# Altium PCB Inverter_full.PcbDoc (part 1 of 2)
Units mm, origin at the board's own origin, x right, y up, seen from the top; angles counter-clockwise.
Board outline 209.55 x 115.54 mm, 2 copper layers (Top Layer, Bottom Layer); 189 components, 97 nets, 520 pads, 122 vias.
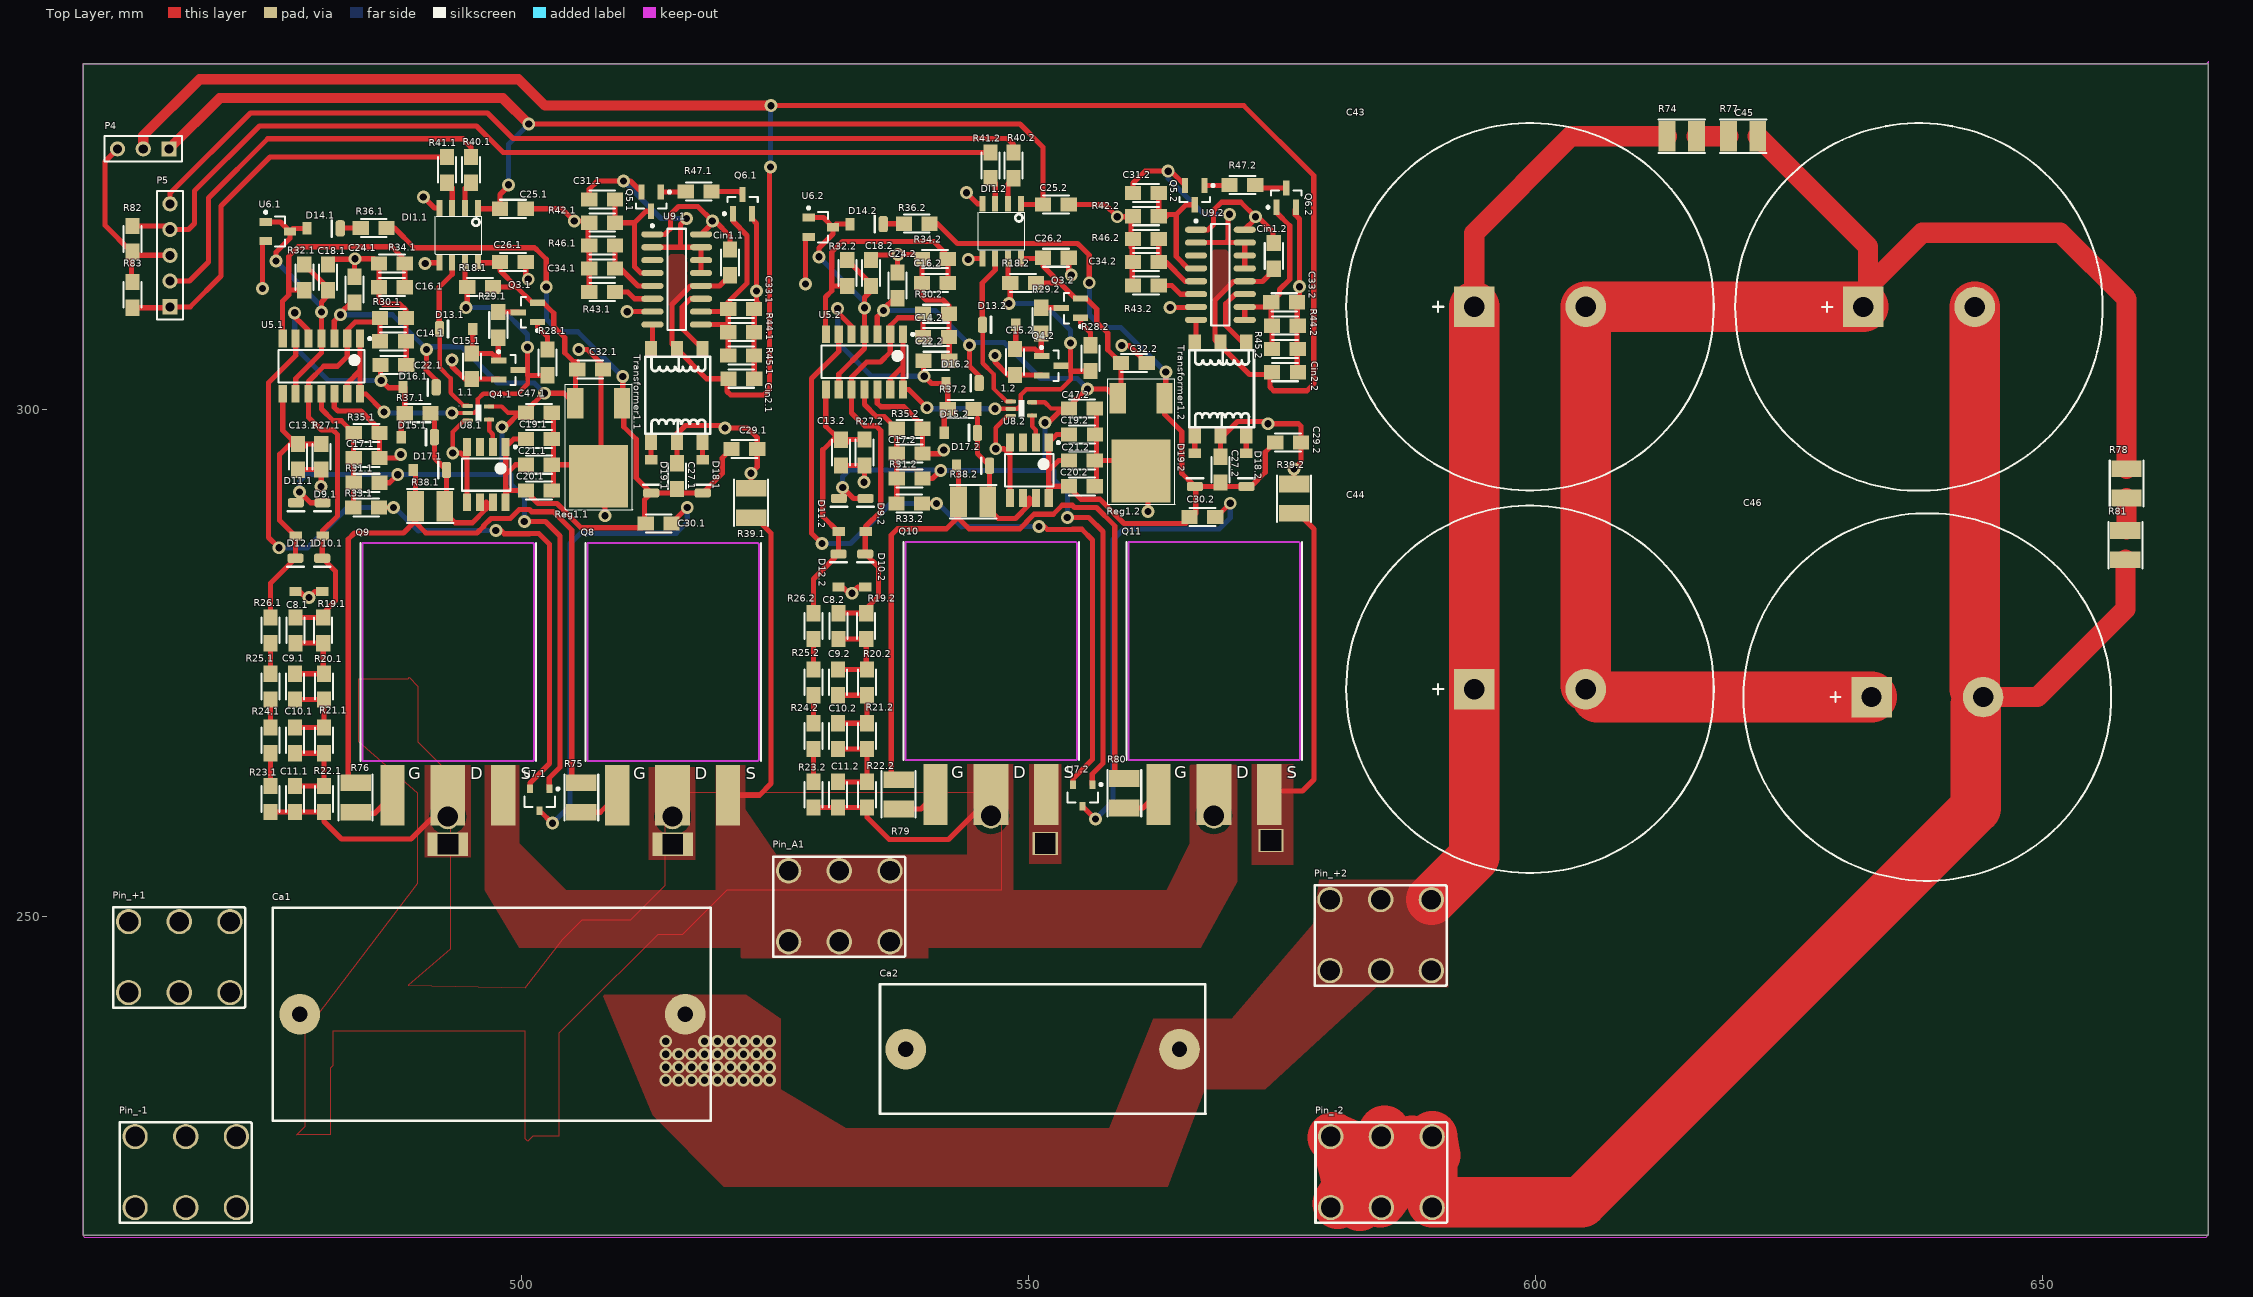
[diagram p0: Top Layer view]
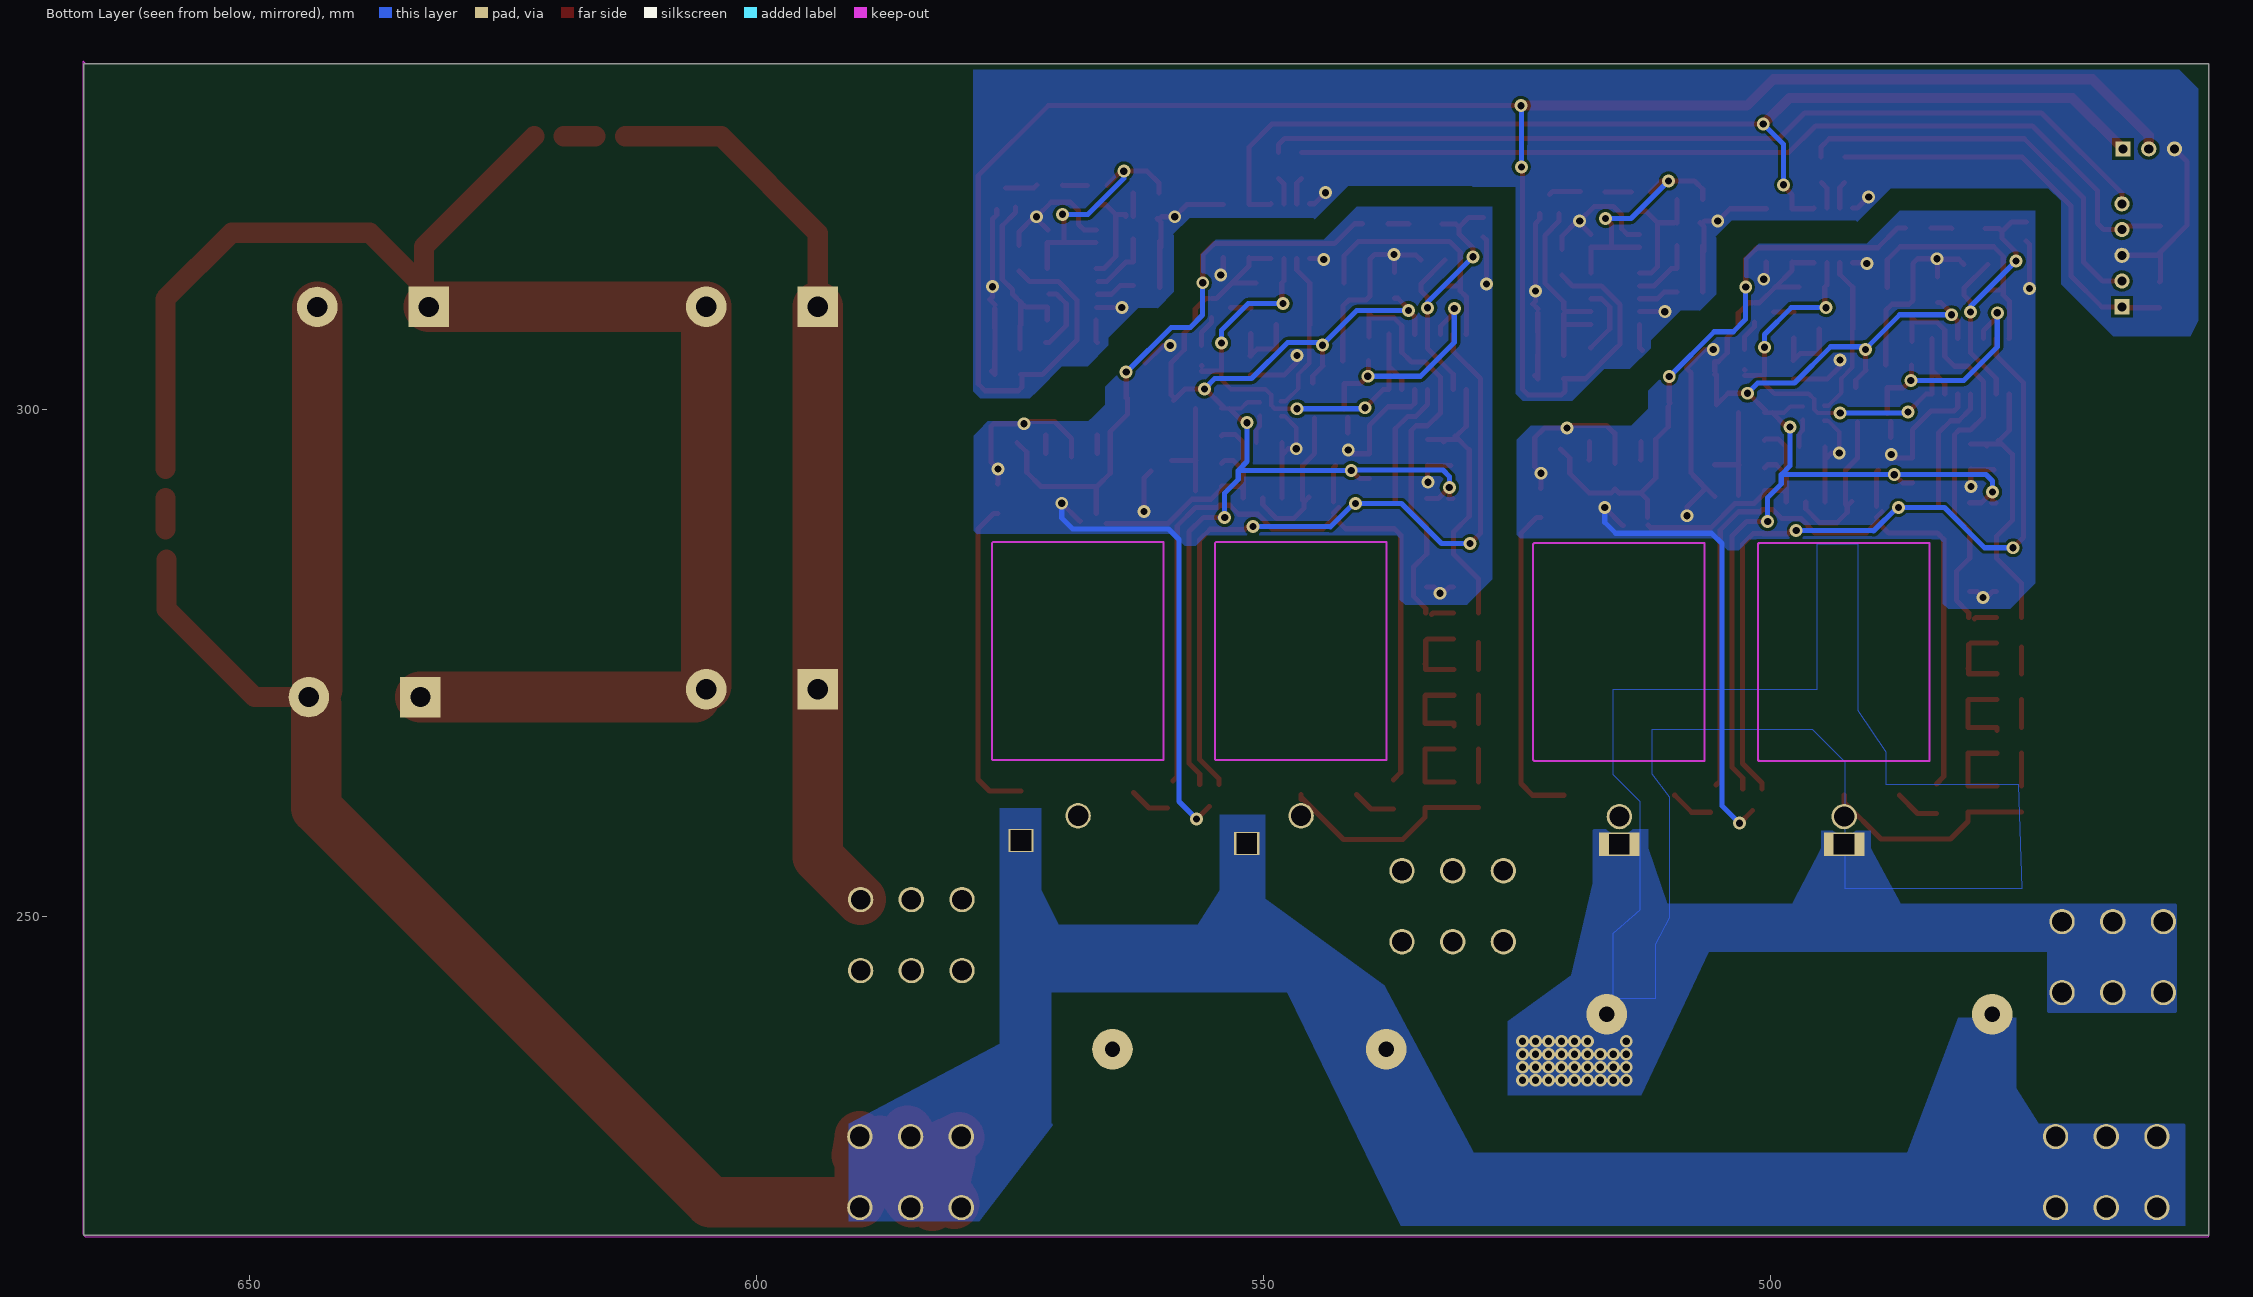
[diagram p1: Bottom Layer view, seen from below]

## Layer stack, top to bottom
Top Solder: solder mask 0.0102, Solder Resist, Dk 3.5
Top Layer: signal copper 0.0356
Dielectric 1: dielectric 0.32, FR-4, Dk 4.8
Bottom Layer: signal copper 0.0356
Bottom Solder: solder mask 0.0102, Solder Resist, Dk 3.5

## Board outline
456.82,218.59 666.37,218.59 666.37,334.13 456.82,334.13

## Design rules (kind name [scope] priority, off if disabled: settings)
Clearance Clearance_1 [InNet('COMMAND.1') vs InNet('OK!.1')] p1: gap=0.2
Clearance [All] p2: gap=0.3
PlaneConnect [All] p1: planeconnectstyle=Direct reliefexpansion=0.508 reliefentries=4 reliefconductorwidth=0.254 reliefairgap=0.254
PolygonConnect [All] p1: connectstyle=Direct reliefconductorwidth=0.254 reliefentries=4 polygonreliefangle="90 Angle" airgapwidth=0.254
RoomDefinition GD1 [InComponentClass('GD1')] p1: confinementstyle=ConfineIn formatcopy=TRUE lockcomponents=FALSE outline 473.97,256.53 525.39,256.53 525.39,326.57 473.97,326.57
RoomDefinition Supply_Iso1 [InComponentClass('Supply_Iso1')] p2: confinementstyle=ConfineIn formatcopy=TRUE lockcomponents=FALSE outline 504.3,285.78 525.43,285.78 525.43,323.58 504.3,323.58
RoomDefinition Supply_Iso2 [InComponentClass('Supply_Iso2')] p3: confinementstyle=ConfineIn formatcopy=TRUE lockcomponents=FALSE outline 557.66,288.18 579.21,288.18 579.21,323.63 557.66,323.63
RoomDefinition OnePhaseMain [InComponentClass('OnePhaseMain')] p4: confinementstyle=ConfineIn formatcopy=TRUE lockcomponents=FALSE outline 458.29,307.98 467.82,307.98 467.82,328.79 458.29,328.79
RoomDefinition MainPower [InComponentClass('MainPower')] p5: confinementstyle=ConfineIn formatcopy=TRUE lockcomponents=FALSE outline 457.88,217.81 660.94,217.81 660.94,329.37 457.88,329.37
RoomDefinition GD2 [InComponentClass('GD2')] p6: confinementstyle=ConfineIn formatcopy=TRUE lockcomponents=FALSE outline 527.21,258.66 583.21,258.66 583.21,326.5 527.21,326.5
RoutingVias [All] p1: holewidth=0.711 width=1.27 viastyle="Through Hole" minholewidth=0.711 minwidth=1.27 maxholewidth=0.711 maxwidth=1.27
SolderMaskExpansion [All] p1: expansion=0.102
UnpouredPolygon [All] p1: allowunpoured=FALSE
Width Width_1 [All] p1: maxlimit=1 minlimit=0.3 preferedwidth=0.51 toplayer_prefwidth=0.5 minimp=50.000000 maximp=50.000000 favimp=50.000000
28 further rules are at their usual default settings.

## Classes and differential pairs
channel class GateDriverPowerSupply: Supply_Iso1 Supply_Iso2
channel class DriverAndProtection: GD1 GD2
net class S[1..2]: S2
net class OK[1..2]: OK1 OK2
net class G[1..2]: G1 G2
net class D[1..2]: D1 D2
net class CMD[1..2]: CMD1 CMD2
component class Supply_Iso2: C27.2 C29.2 C30.2 C31.2 C32.2 C33.2 C34.2 Cin1.2 Cin2.2 D18.2 D19.2 Q5.2 Q6.2 R42.2 R43.2 R44.2 R45.2 R46.2 R47.2 Reg1.2 Transformer1.2 U9.2
component class Supply_Iso1: C27.1 C29.1 C30.1 C31.1 C32.1 C33.1 C34.1 Cin1.1 Cin2.1 D18.1 D19.1 Q5.1 Q6.1 R42.1 R43.1 R44.1 R45.1 R46.1 R47.1 Reg1.1 Transformer1.1 U9.1
component class OnePhaseMain: P4 P5 R82 R83 R?
component class MainPower: C43 C44 C45 C46 Ca1 Ca2 Pin_+1 Pin_+2 Pin_-1 Pin_-2 Pin_A1 Q8 Q9 Q10 Q11 R74 R75 R76 R77 R78 R79 R80 R81
component class GD2: 1.2 C8.2 C9.2 C10.2 C11.2 C13.2 C14.2 C15.2 C16.2 C17.2 C18.2 C19.2 C20.2 C21.2 C22.2 C24.2 C25.2 C26.2 C47.2 C?.2 D9.2 D10.2 D11.2 D12.2 D13.2 D14.2 D15.2 D16.2 D17.2 D?.2 DI1.2 Q3.2 Q4.2 R18.2 R19.2 R20.2 R21.2 R22.2 R23.2 R24.2 R25.2 R26.2 R27.2 R28.2 R29.2 R30.2 R31.2 R32.2 R33.2 R34.2 R35.2 R36.2 R37.2 R38.2 R39.2 R40.2 R41.2 R?.2 U5.2 U6.2 U7.2 U8.2
component class GD1: 1.1 C8.1 C9.1 C10.1 C11.1 C12.1 C13.1 C14.1 C15.1 C16.1 C17.1 C18.1 C19.1 C20.1 C21.1 C22.1 C24.1 C25.1 C26.1 C47.1 C?.1 D9.1 D10.1 D11.1 D12.1 D13.1 D14.1 D15.1 D16.1 D17.1 D?.1 DI1.1 Q3.1 Q4.1 R18.1 R19.1 R20.1 R21.1 R22.1 R23.1 R24.1 R25.1 R26.1 R27.1 R28.1 R29.1 R30.1 R31.1 R32.1 R33.1 R34.1 R35.1 R36.1 R37.1 R38.1 R39.1 R40.1 R41.1 R?.1 U5.1 U6.1 U7.1

## Components (designator, comment, footprint, x,y, rotation, side; value= is the part's Value field where it differs from the comment)
1.1 "" SOT353 495.769,299.681 r0 top (schematic designator 1)
1.2 "" SOT353 549.319,300.101 r0 top (schematic designator 1)
C8.1 "Cap_0805" 0805_W 477.71,278.257 r90 top (schematic designator C8)
C8.2 "Cap_0805" 0805_W 531.26,278.677 r90 top (schematic designator C8)
C9.1 "Cap_0805" 0805_W 477.681,272.706 r90 top (schematic designator C9)
C9.2 "Cap_0805" 0805_W 531.231,273.127 r90 top (schematic designator C9)
C10.1 "Cap_0805" 0805_W 477.681,267.406 r90 top (schematic designator C10)
C10.2 "Cap_0805" 0805_W 531.231,267.827 r90 top (schematic designator C10)
C11.1 "Cap_0805" 0805_W 477.681,261.62 r90 top (schematic designator C11)
C11.2 "Cap_0805" 0805_W 531.231,262.04 r90 top (schematic designator C11)
C13.1 "Cap_0805" 0805_W 477.99,295.38 r270 top (schematic designator C13)
C13.2 "Cap_0805" 0805_W 531.54,295.8 r270 top (schematic designator C13)
C14.1 "Cap_0805" 0805_W 487.34,306.769 r0 top (schematic designator C14)
C14.2 "Cap_0805" 0805_W 540.89,307.189 r0 top (schematic designator C14)
C15.1 "Cap_0805" 0805_W 495.13,304.308 r270 top (schematic designator C15)
C15.2 "Cap_0805" 0805_W 548.68,304.729 r270 top (schematic designator C15)
C16.1 "Cap_0805" 0805_W 487.25,312.09 r180 top (schematic designator C16)
C16.2 "Cap_0805" 0805_W 540.8,312.51 r180 top (schematic designator C16)
C17.1 "Cap_0805" 0805_W 484.73,295.27 r0 top (schematic designator C17)
C17.2 "Cap_0805" 0805_W 538.28,295.69 r0 top (schematic designator C17)
C18.1 "Cap_0805" 0805_W 480.93,313.07 r90 top (schematic designator C18)
C18.2 "Cap_0805" 0805_W 534.48,313.49 r90 top (schematic designator C18)
C19.1 "Cap_0805" 0805_W 501.75,297.13 r180 top (schematic designator C19)
C19.2 "Cap_0805" 0805_W 555.3,297.55 r180 top (schematic designator C19)
C20.1 "Capacitor_nao_polarizado" 0805_W 501.73,292.05 r0 top (schematic designator C20)
C20.2 "Capacitor_nao_polarizado" 0805_W 555.28,292.47 r0 top (schematic designator C20)
C21.1 "Capacitor_nao_polarizado" 0805_W 501.73,294.6 r0 top (schematic designator C21)
C21.2 "Capacitor_nao_polarizado" 0805_W 555.28,295.02 r0 top (schematic designator C21)
C22.1 "Cap_0805" 0805_W 487.37,304.43 r0 top (schematic designator C22)
C22.2 "Cap_0805" 0805_W 540.92,304.85 r0 top (schematic designator C22)
C24.1 "Cap_0805" 0805_W 483.54,311.85 r90 top (schematic designator C24)
C24.2 "Cap_0805" 0805_W 537.09,312.27 r90 top (schematic designator C24)
C25.1 "Cap_0805" 0805_W 499.18,319.82 r180 top (schematic designator C25)
C25.2 "Cap_0805" 0805_W 552.73,320.24 r180 top (schematic designator C25)
C26.1 "Cap_0805" 0805_W 499.18,314.573 r180 top (schematic designator C26)
C26.2 "Cap_0805" 0805_W 552.73,314.993 r180 top (schematic designator C26)
C27.1 "Capacitor_nao_polarizado" 0805_W 515.331,293.449 r90 top (schematic designator C27)
C27.2 "Capacitor_nao_polarizado" 0805_W 568.947,294.089 r90 top (schematic designator C27)
C29.1 "Capacitor_nao_polarizado" 0805_W 521.99,296.16 r0 top (schematic designator C29)
C29.2 "Capacitor_nao_polarizado" 0805_W 575.605,296.8 r0 top (schematic designator C29)
C30.1 "Capacitor_nao_polarizado" 0805_W 513.54,288.8 r0 top (schematic designator C30)
C30.2 "Capacitor_nao_polarizado" 0805_W 567.155,289.44 r0 top (schematic designator C30)
C31.1 "Cap_0805" 0805_W 507.968,320.743 r0 top (schematic designator C31)
C31.2 "Cap_0805" 0805_W 561.583,321.383 r0 top (schematic designator C31)
C32.1 "Capacitor_nao_polarizado" 0805_W 506.79,303.98 r0 top (schematic designator C32)
C32.2 "Capacitor_nao_polarizado" 0805_W 560.405,304.62 r0 top (schematic designator C32)
C33.1 "Cap_0805" 0805_W 521.691,309.939 r180 top (schematic designator C33)
C33.2 "Cap_0805" 0805_W 575.24,310.6 r180 top (schematic designator C33)
C34.1 "Cap_0805" 0805_W 507.981,313.919 r180 top (schematic designator C34)
C34.2 "Cap_0805" 0805_W 561.597,314.559 r180 top (schematic designator C34)
C43 "Cap2" "Capacitor Eletrolitico - duplicate" 593.97,310.17 r0 top
C44 "Cap2" "Capacitor Eletrolitico - duplicate" 593.97,272.45 r0 top
C45 "Cap2" "Capacitor Eletrolitico - duplicate" 632.33,310.15 r0 top
C46 "Cap2" "Capacitor Eletrolitico - duplicate" 633.16,271.68 r0 top
C47.1 "Capacitor_nao_polarizado" 0805_W 501.748,299.7 r180 top (schematic designator C47)
C47.2 "Capacitor_nao_polarizado" 0805_W 555.298,300.12 r180 top (schematic designator C47)
Ca1 "Polyester" "Capacitor_Pol_2 - 38mm" 516.16,240.39 r180 top
Ca2 "Polyester" Capacitor_Pol_2 564.91,236.95 r180 top
Cin1.1 "Cap_0805" 0805_W 520.581,314.54 r90 top (schematic designator Cin1)
Cin1.2 "Cap_0805" 0805_W 574.196,315.18 r90 top (schematic designator Cin1)
Cin2.1 "Cap_0805" 0805_W 521.691,303.081 r0 top (schematic designator Cin2)
Cin2.2 "Cap_0805" 0805_W 575.306,303.721 r0 top (schematic designator Cin2)
D9.1 "D Schottky" SOD-123 480.404,289.208 r90 top (schematic designator D9)
D9.2 "D Schottky" SOD-123 533.954,289.628 r90 top (schematic designator D9)
D10.1 "D Schottky" SOD-123 480.364,283.735 r90 top (schematic designator D10)
D10.2 "D Schottky" SOD-123 533.914,284.155 r90 top (schematic designator D10)
D11.1 "D Schottky" SOD-123 477.77,289.208 r90 top (schematic designator D11)
D11.2 "D Schottky" SOD-123 531.32,289.628 r90 top (schematic designator D11)
D12.1 "D Schottky" SOD-123 477.73,283.735 r90 top (schematic designator D12)
D12.2 "D Schottky" SOD-123 531.28,284.155 r90 top (schematic designator D12)
D13.1 "B2-smd" SOD-123 493.57,307.97 r180 top (schematic designator D13)
D13.2 "B2-smd" SOD-123 547.12,308.39 r180 top (schematic designator D13)
D14.1 "Bzv55c6v8" SOD-123 480.51,317.9 r0 top (schematic designator D14)
D14.2 "Bzv55c6v8" SOD-123 534.06,318.32 r0 top (schematic designator D14)
D15.1 "D Schottky" SOD-123 489.799,297.308 r0 top (schematic designator D15)
D15.2 "D Schottky" SOD-123 543.349,297.728 r0 top (schematic designator D15)
D16.1 "D Schottky" SOD-123 489.97,302.22 r0 top (schematic designator D16)
D16.2 "D Schottky" SOD-123 543.52,302.64 r0 top (schematic designator D16)
D17.1 "B2-smd" SOD-123 490.99,294.07 r0 top (schematic designator D17)
D17.2 "B2-smd" SOD-123 544.54,294.49 r0 top (schematic designator D17)
D18.1 "B2-SMD" SOD-123 517.891,293.436 r270 top (schematic designator D18)
D18.2 "B2-SMD" SOD-123 571.506,294.076 r270 top (schematic designator D18)
D19.1 "B2-smd" SOD-123 512.811,293.436 r270 top (schematic designator D19)
D19.2 "B2-smd" SOD-123 566.426,294.076 r270 top (schematic designator D19)
DI1.1 "Si8421AD-D-IS" 8SOIC 495.724,314.506 r0 top (schematic designator DI1)
DI1.2 "Si8421AD-D-IS" 8SOIC 549.274,314.926 r0 top (schematic designator DI1)
P4 "Header 3" HDR1X3 465.26,325.74 r180 top
P5 "Header 5" HDR1X5 465.36,310.16 r90 top
Pin_+1 "Socket" "Power conector" 471.27,249.54 r180 top
Pin_+2 "Socket" "Power conector" 589.75,251.71 r180 top
Pin_-1 "Socket" "Power conector" 471.91,228.34 r180 top
Pin_-2 "Socket" "Power conector" 589.82,228.34 r180 top
Pin_A1 "Socket" "Power conector" 536.36,254.55 r180 top
Q3.1 "BC857" SOT-23-TT3_N 500.65,309.61 r180 top (schematic designator Q3)
Q3.2 "BC857" SOT-23-TT3_N 554.2,310.03 r180 top (schematic designator Q3)
Q4.1 "BC847" SOT-23-TT3_N 498.72,303.93 r0 top (schematic designator Q4)
Q4.2 "BC847" SOT-23-TT3_N 552.27,304.35 r0 top (schematic designator Q4)
Q5.1 "BC857" SOT-23-TT3_N 512.801,320.541 r270 top (schematic designator Q5)
Q5.2 "BC857" SOT-23-TT3_N 566.416,321.181 r270 top (schematic designator Q5)
Q6.1 "BC847" SOT-23-TT3_N 521.818,320.292 r90 top (schematic designator Q6)
Q6.2 "BC847" SOT-23-TT3_N 575.433,320.932 r90 top (schematic designator Q6)
Q8 "IRFP260" TO227 514.92,261.99 r0 top
Q9 "IRFP260" TO227 492.752,261.99 r0 top
Q10 "IRFP260" TO227 546.31,262.07 r0 top
Q11 "IRFP260" TO227 568.3,262.07 r0 top
R18.1 "Res_0805" 0805_W 495.93,312.11 r0 top (schematic designator R18)
R18.2 "Res_0805" 0805_W 549.48,312.53 r0 top (schematic designator R18)
R19.1 "Res_0805" 0805_W 480.47,278.27 r270 top (schematic designator R19)
R19.2 "Res_0805" 0805_W 534.02,278.69 r270 top (schematic designator R19)
R20.1 "Res_0805" 0805_W 480.531,272.706 r90 top (schematic designator R20)
R20.2 "Res_0805" 0805_W 534.081,273.127 r90 top (schematic designator R20)
R21.1 "Res_0805" 0805_W 480.531,267.406 r90 top (schematic designator R21)
R21.2 "Res_0805" 0805_W 534.081,267.827 r90 top (schematic designator R21)
R22.1 "Res_0805" 0805_W 480.549,261.633 r270 top (schematic designator R22)
R22.2 "Res_0805" 0805_W 534.099,262.054 r270 top (schematic designator R22)
R23.1 "Res_0805" 0805_W 475.28,261.633 r270 top (schematic designator R23)
R23.2 "Res_0805" 0805_W 528.83,262.054 r270 top (schematic designator R23)
R24.1 "Res_0805" 0805_W 475.28,267.42 r270 top (schematic designator R24)
R24.2 "Res_0805" 0805_W 528.83,267.84 r270 top (schematic designator R24)
R25.1 "Res_0805" 0805_W 475.28,272.72 r270 top (schematic designator R25)
R25.2 "Res_0805" 0805_W 528.83,273.14 r270 top (schematic designator R25)
R26.1 "Res_0805" 0805_W 475.28,278.27 r270 top (schematic designator R26)
R26.2 "Res_0805" 0805_W 528.83,278.69 r270 top (schematic designator R26)
R27.1 "Res_0805" 0805_W 480.27,295.37 r90 top (schematic designator R27)
R27.2 "Res_0805" 0805_W 533.82,295.79 r90 top (schematic designator R27)
R28.1 "Res_0805" 0805_W 502.59,304.68 r270 top (schematic designator R28)
R28.2 "Res_0805" 0805_W 556.14,305.1 r270 top (schematic designator R28)
R29.1 "Res_0805" 0805_W 497.74,308.38 r270 top (schematic designator R29)
R29.2 "Res_0805" 0805_W 551.29,308.8 r270 top (schematic designator R29)
R30.1 "Res_0805" 0805_W 487.354,309.05 r180 top (schematic designator R30)
R30.2 "Res_0805" 0805_W 540.904,309.47 r180 top (schematic designator R30)
R31.1 "Res_0805" 0805_W 484.73,292.82 r0 top (schematic designator R31)
R31.2 "Res_0805" 0805_W 538.28,293.24 r0 top (schematic designator R31)
R32.1 "Res_0805" 0805_W 478.59,313.07 r90 top (schematic designator R32)
R32.2 "Res_0805" 0805_W 532.14,313.49 r90 top (schematic designator R32)
R33.1 "Res_0805" 0805_W 484.7,290.37 r0 top (schematic designator R33)
R33.2 "Res_0805" 0805_W 538.25,290.79 r0 top (schematic designator R33)
R34.1 "Res_0805" 0805_W 487.25,314.44 r180 top (schematic designator R34)
R34.2 "Res_0805" 0805_W 540.8,314.86 r180 top (schematic designator R34)
R35.1 "Res_0805" 0805_W 484.73,297.72 r0 top (schematic designator R35)
R35.2 "Res_0805" 0805_W 538.28,298.14 r0 top (schematic designator R35)
R36.1 "Res_0805" 0805_W 485.44,317.95 r0 top (schematic designator R36)
R36.2 "Res_0805" 0805_W 538.99,318.37 r0 top (schematic designator R36)
R37.1 "Res_0805" 0805_W 489.77,299.68 r0 top (schematic designator R37)
R37.2 "Res_0805" 0805_W 543.32,300.1 r0 top (schematic designator R37)
R38.1 "Res_1210" 1210_W 489.558,290.503 r0 top (schematic designator R38)
R38.2 "Res_1210" 1210_W 543.108,290.923 r0 top (schematic designator R38)
R39.1 "Res_1210" 1210_W 522.67,289.372 r90 top (schematic designator R39)
R39.2 "Res_1210" 1210_W 576.22,289.793 r90 top (schematic designator R39)
R40.1 "Res_1210" 0805_W 495.02,323.67 r90 top (schematic designator R40)
R40.2 "Res_1210" 0805_W 548.541,324.094 r90 top (schematic designator R40)
R41.1 "Res_1210" 0805_W 492.67,323.67 r90 top (schematic designator R41)
R41.2 "Res_1210" 0805_W 546.255,324.094 r90 top (schematic designator R41)
R42.1 "Res_0805" 0805_W 507.968,318.467 r0 top (schematic designator R42)
R42.2 "Res_0805" 0805_W 561.583,319.107 r0 top (schematic designator R42)
R43.1 "Res_0805" 0805_W 507.97,311.63 r0 top (schematic designator R43)
R43.2 "Res_0805" 0805_W 561.585,312.27 r0 top (schematic designator R43)
R44.1 "Res_0805" 0805_W 521.691,307.653 r180 top (schematic designator R44)
R44.2 "Res_0805" 0805_W 575.306,308.293 r180 top (schematic designator R44)
R45.1 "Res_0805" 0805_W 521.691,305.367 r180 top (schematic designator R45)
R45.2 "Res_0805" 0805_W 575.306,306.007 r180 top (schematic designator R45)
R46.1 "Res_0805" 0805_W 507.968,316.224 r0 top (schematic designator R46)
R46.2 "Res_0805" 0805_W 561.583,316.864 r0 top (schematic designator R46)
R47.1 "Res_0805" 0805_W 517.497,321.533 r180 top (schematic designator R47)
R47.2 "Res_0805" 0805_W 571.113,322.173 r180 top (schematic designator R47)
R74 "Res_1210" 1210_W 612.99,326.97 r0 top
R75 "Res_1210" 1210_W 505.93,260.32 r90 top
R76 "Res_1210" 1210_W 483.66,260.32 r90 top
R77 "Res_1210" 1210_W 619.04,326.97 r0 top
R78 "Res_1210" 1210_W 658.3,294.2 r270 top
R79 "Res_1210" 1210_W 537.21,260.63 r90 top
R80 "Res_1210" 1210_W 559.48,260.74 r90 top
R81 "Res_1210" 1210_W 658.19,288.11 r270 top
R82 "Res_1210" 0805_W 461.659,316.86 r270 top
R83 "Res_1210" 0805_W 461.64,311.34 r90 top
Reg1.1 "LM7805" LM7805 507.621,297.05 r90 top (schematic designator Reg1)
Reg1.2 "LM7805" LM7805 561.12,297.562 r90 top (schematic designator Reg1)
Transformer1.1 "WE-PP" Trafo 515.341,301.43 r270 top (schematic designator Transformer1)
Transformer1.2 "WE-PP" Trafo 568.956,302.07 r270 top (schematic designator Transformer1)
U5.1 "LM339" SOIC-14N 465.05,293.405 r270 top (schematic designator U5)
U5.2 "LM339" SOIC-14N 518.6,293.825 r270 top (schematic designator U5)
U6.1 "TL431ACLP" SOT-3N 475.99,317.59 r0 top (schematic designator U6)
U6.2 "TL431ACLP" SOT-3N 529.54,318.01 r0 top (schematic designator U6)
U7.1 "MCP9700T-E/TT" SOT-23_L 501.81,261.55 r270 top (schematic designator U7)
U7.2 "MCP9700T-E/TT" SOT-23_L 555.36,261.97 r270 top (schematic designator U7)
U8.1 "TC4420COA" SOIC-8N 496.555,293.625 r270 top (schematic designator U8)
U8.2 "TC4420COA" SOIC-8N 550.105,294.045 r270 top (schematic designator U8)
U9.1 "TL494ID" SOIC16_N 515.328,312.86 r0 top (schematic designator U9)
U9.2 "TL494ID" SOIC16_N 568.94,313.32 r0 top (schematic designator U9)

## Footprints (in the part's own frame and the unit in brackets; to place one, negate y for a bottom-side part, rotate by r counter-clockwise, add the part's x,y. Pads: shape width x height; smd on the part's side, far side on the other; paste and mask are expansions set on the pad)
8SOIC [mm] "SI841"
  rect 0.6x1.55 smd: 1(0,5.4) 2(-1.27,5.4) 3(-2.54,5.4) 4(-3.81,5.4) 5(-3.81,0) 6(-2.54,0) 7(-1.27,0) 8(0,0)
  silkscreen extent -4.19,0.86 0.39,4.58
0805_W [mm]
  rect 1.6x1.397 smd: 1(-1.263,-0.009) 2(1.277,-0.009)
  silkscreen extent -1.26,-0.9 1.28,0.88
1210_W [mm]
  rect 1.65x3 smd: 1(0,0) 2(2.9,0)
  silkscreen extent -0.83,-1.66 3.74,1.68
"Capacitor Eletrolitico - duplicate" [mm]
  rect 4x4 hole 2: 1(0,0)
  round 4 hole 2: 2(11,0)
  silkscreen extent -12.62,-18.12 23.62,18.12, body extent -12.63,-18.13 23.63,18.13, height 40
Capacitor_Pol_2 [mm]
  round 4 hole 1.5: 1(0,0) 2(27,0)
  silkscreen extent -2.57,-6.43 29.54,6.35
"Capacitor_Pol_2 - 38mm" [mm]
  round 4 hole 1.5: 1(0,0) 2(38,0)
  silkscreen extent -2.54,-10.52 40.66,10.5
HDR1X3 [mm] "Connector; Header; 3 Position"
  rect 1.5x1.5 hole 0.9: 1(0,0)
  round 1.5 hole 0.9: 2(2.54,0) 3(5.08,0)
  silkscreen extent -1.27,-1.27 6.35,1.27
HDR1X5 [mm] "Connector; Header; 5 Position"
  rect 1.5x1.5 hole 0.9: 1(0,0)
  round 1.5 hole 0.9: 2(2.54,0) 3(5.08,0) 4(7.62,0) 5(10.16,0)
  silkscreen extent -1.27,-1.27 11.43,1.27
LM7805 [mm]
  rect 6.2x5.8 smd: 1(-3.6,0)
  rect 3x1.6 smd: 2(3.6,2.3) 3(3.6,-2.3)
  silkscreen extent -6.88,-3.36 5.5,3.27
"Power conector" [mm] "Screw M4 and 30A"
  round 2.5 hole 1.93: 1(0,7) 1(0,0) 1(5,7) 1(5,0) 1(10,7) 1(10,0)
  silkscreen extent -1.5,-1.4 11.5,8.5
SOD-123 [mm] "Diodo"
  rect 0.91x1.22 smd: 1(-1.635,0)
  rrect50% 0.91x1.6 smd: 2(1.635,0)
  silkscreen extent 0.8,-0.8 0.8,0.8
SOIC16_N [mm] "SOIC, 16-Leads, Body 9.9x3.9mm, Pitch 1.27mm, IPC Medium Density"
  oval 2.2x0.6 smd: 1(-2.4,4.445) 2(-2.4,3.175) 3(-2.4,1.905) 4(-2.4,0.635) 5(-2.4,-0.635) 6(-2.4,-1.905) 7(-2.4,-3.175) 8(-2.4,-4.445) 9(2.4,-4.445) 10(2.4,-3.175) 11(2.4,-1.905) 12(2.4,-0.635) 13(2.4,0.635) 14(2.4,1.905) 15(2.4,3.175) 16(2.4,4.445)
  silkscreen extent -2.52,-5 0.9,5.42, body extent -2,-5 2,5, height 1.91
SOIC-8N [mm] "SOIC, 8-Leads, Body 4,89x3,90mm, Pitch 1,27mm, IPC Medium Density"
  rect 1.75x0.8 smd: 1(-2.725,1.905) 2(-2.725,0.635) 3(-2.725,-0.635) 4(-2.725,-1.905) 5(2.725,-1.905) 6(2.725,-0.635) 7(2.725,0.635) 8(2.725,1.905)
  silkscreen extent -2.85,-2.4 1.6,2.98, body extent -2,-2.4 2,2.4, height 3.18
SOIC-14N [mm] "SOIC, 14-Leads, Body 8,61x3,90mm, Pitch 1,27mm, IPC Medium Density"
  rect 1.75x0.8 smd: 1(-13.625,19.05) 2(-13.625,17.78) 3(-13.625,16.51) 4(-13.625,15.24) 5(-13.625,13.97) 6(-13.625,12.7) 7(-13.625,11.43) 8(-8.175,11.43) 9(-8.175,12.7) 10(-8.175,13.97) 11(-8.175,15.24) 12(-8.175,16.51) 13(-8.175,17.78) 14(-8.175,19.05)
  silkscreen extent -13.75,10.99 -9.3,20.13, body extent -12.9,10.99 -8.9,19.49, height 1.75
SOT353 [mm]
  round 0.5 on Mech15: 0(0,0)
  rrect50% 1x0.4 smd mask+0: 1(-1.05,0.71) 2(-1.05,0) 3(-1.05,-0.72) 4(1.05,-0.65) 5(1.05,0.65)
  silkscreen extent -0.3,-0.85 0.3,0.85, body extent -1.2,-1.1 1.2,1.1, height 1.1
SOT-3N [mm] "SOT23, 3-Leads, Body 2,90x2,45mm, Pitch 0,95mm, IPC Medium Density"
  rect 1.2x0.8 smd: 1(-1.2,0.95) 2(-1.2,-0.95) 3(1.2,0)
  silkscreen extent -1.32,-1.5 0.7,2.02, body extent -0.7,-1.5 0.7,1.5, height 1.1
SOT-23-TT3_N [mm] "SOT23, 3-Leads, Body 2.9x1.3mm, Pitch 0.95mm, Lead Span 2.4mm, IPC Medium Density"
  rect 1.5x0.6 smd: 1(-0.95,0.95) 2(-0.95,-0.95) 3(0.95,0)
  silkscreen extent -1.07,-1.5 0.7,1.92, body extent -0.7,-1.5 0.7,1.5, height 1.12
SOT-23_L [mm] "SOT23, 3-Leads, Body 2.9x1.3mm, Pitch 0.95mm, Lead Span 2.5mm, IPC High Density"
  rect 0.85x0.6 smd: 1(-1.075,0.95) 2(-1.075,-0.95) 3(1.075,0)
  silkscreen extent -1.2,-1.5 0.7,1.93, body extent -0.7,-1.5 0.7,1.5, height 1.1
TO227 [mm]
  rect 2.39x6 smd: 1(-5.46,0) 3(5.46,0)
  round 2.5 hole 2: 2(0,-2.1)
  rect 3.43x6 smd: 2(0,0)
  Keep-Out Layer lines w0.2: -8.4,3.38 8.4,3.38 8.5,3.48 8.5,24.78 8.4,24.88 -8.4,24.88 -8.4,3.38
  silkscreen extent -8.6,3.38 8.7,24.88, body extent -8.5,3.38 8.5,24.88, height 2.5
Trafo [mm] "transformador smd TI"
  rect 1.6x1.2 smd: 1(-4.57,2.54) 2(-4.57,0) 3(-4.57,-2.54) 4(4.57,-2.54) 5(4.57,0) 6(4.57,2.54)
  silkscreen extent -3.8,-3.1 3.8,3.3

## Part data
1.1 1.2: library part AND
C8.1 C8.2 C9.1 C9.2 C10.1 C10.2 C11.1 C11.2 C13.1 C13.2 C14.1 C14.2 C15.1 C15.2 C16.1 C16.2 C17.1 C17.2 C18.1 C18.2 C19.1 C19.2 C22.1 C22.2 C24.1 C24.2 C25.1 C25.2 C26.1 C26.2 C31.1 C31.2 C33.1 C33.2 C34.1 C34.2 C43 C44 C45 C46 Cin1.1 Cin1.2 Cin2.1 Cin2.2: "Capacitor"
C20.1 C20.2 C21.1 C21.2 C27.1 C27.2 C29.1 C29.2 C30.1 C30.2 C32.1 C32.2 C47.1 C47.2: "Capacitor nao polarizado"
Ca1 Ca2: library part GRM21BC81E475KA12L, "GRM21BC81E475KA1"
D9.1 D9.2 D10.1 D10.2 D11.1 D11.2 D12.1 D12.2 D15.1 D15.2 D16.1 D16.2: "Schottky Diode"
D13.1 D13.2 D17.1 D17.2 D18.1 D18.2 D19.1 D19.2: library part Schottky, "Diodo Schottky"
D14.1 D14.2: library part "D Zener", "Zener Diode"
DI1.1 DI1.2: library part FOD8012, "Two Channel, High Speed Digital Isolators"
P4: "Header, 3-Pin"
P5: "Header, 5-Pin"
Q3.1 Q3.2 Q5.1 Q5.2: "PNP General-purpose Transistor"
Q4.1 Q4.2 Q6.1 Q6.2: "NPN General-purpose Transistor"
Q8 Q9 Q10 Q11: "HEXFET Power MOSFET"
R18.1 R18.2 R19.1 R19.2 R20.1 R20.2 R21.1 R21.2 R22.1 R22.2 R23.1 R23.2 R24.1 R24.2 R25.1 R25.2 R26.1 R26.2 R27.1 R27.2 R28.1 R28.2 R29.1 R29.2 R30.1 R30.2 R31.1 R31.2 R32.1 R32.2 R33.1 R33.2 R34.1 R34.2 R35.1 R35.2 R36.1 R36.2 R37.1 R37.2 R42.1 R42.2 R43.1 R43.2 R44.1 R44.2 R45.1 R45.2 R46.1 R46.2 R47.1 R47.2: "Resistor"
R38.1 R38.2 R39.1 R39.2 R40.1 R40.2 R41.1 R41.2 R74 R75 R76 R77 R78 R79 R80 R81 R82 R83: library part Res_0805, "Resistor"
Transformer1.1 Transformer1.2: library part Trafo-TI
U5.1 U5.2: library part LM339AD, "Low-Power Quad Voltage Comparator"
U6.1 U6.2: "Programmable Precision Reference"
U7.1 U7.2: "Low-Power Linear Active Thermistor IC, 3-Pin SOT-23, Extended Temperature, Tape and Reel"
U8.1 U8.2: "6A High-Speed MOSFET Driver, Non-Inverting, Commercial Temperature"
U9.1 U9.2: "Pulse-Width-Modulation Control Circuit"

## Free pads (board coordinates)
  rect 4x2.3 hole 2 square unplated: 2(492.758,257.171) 2(514.927,257.171)
  rect 2.5x2.3 hole 2 square unplated: 2(551.67,257.24) 2(573.93,257.54)

## Via types
v1: diameter 1.27, hole 0.711, Top Layer to Bottom Layer, 122 vias

## Nets (pads, with @x,y where several pads share a name; then routed paths per layer and width w, separated by ;. In a path a pad name is that pad's centre, name@x,y a point inside that pad or via, vN(x,y) a via of type N, cw(c..) or ccw(c..) an arc to the next point about the centre after c; other vN are vias at no path point)
5V_REF.1: C31.1.1 Q5.1.2 U9.1.2 U9.1.13 U9.1.14 U9.1.15 | length 25.1
  Top Layer w0.51: C31.1.1@506.705,320.734 506.705,321.765 507.52,322.58 v1(510.071,322.58) 510.762,322.58 Q5.1.2@511.851,321.491 ; U9.1.2@512.928,316.035 515.697,316.035 ; v1(516.287,318.864) 515.697,318.274 515.697,316.035 ; U9.1.13@517.728,313.495 U9.1.14@517.728,314.765 U9.1.15@517.728,316.035 515.697,316.035
  Bottom Layer w0.51: v1(510.071,322.58) 513.787,318.864 v1(516.287,318.864)
5V_REF.2: C31.2.1 Q5.2.2 U9.2.2 U9.2.13 U9.2.14 U9.2.15 | length 25.7
  Top Layer w0.51: C31.2.1@560.32,321.374 560.32,322.36 561.5,323.54 v1(563.79,323.54) 564.057,323.54 Q5.2.2@565.466,322.131 ; U9.2.2@566.54,316.495 569.48,316.495 ; v1(569.837,319.284) 569.685,319.132 569.685,316.7 569.48,316.495 ; U9.2.13@571.34,313.955 U9.2.14@571.34,315.225 U9.2.15@571.34,316.495 569.48,316.495
  Bottom Layer w0.51: v1(563.79,323.54) 563.79,322.831 567.351,319.27 569.823,319.27 v1(569.837,319.284)
+5: C25.1.2 C25.2.2 DI1.1.1 DI1.2.1 P4.1 | length 109.9
  Top Layer w0.51: DI1.1.1@495.724,319.906 495.801,319.829 C25.1.2@497.903,319.829 497.903,321.243 498.74,322.08 v1(498.74,322.19) ; v1(500.73,328.19) 549.17,328.19 551.453,325.907 C25.2.2@551.453,320.25 549.35,320.25 DI1.2.1@549.274,320.326
  Top Layer w1: P4.1@465.26,325.74 470.26,330.74 498.18,330.74 v1(500.73,328.19)
  Bottom Layer w0.51: v1(498.74,322.19) 498.74,326.2 v1(500.73,328.19)
+5V_ISO.1: 1.1.5 C24.1.1 C26.1.2 C32.1.1 C47.1.2 D9.1.2 D11.1.2 D16.1.2 DI1.1.8 Q3.1.2 R18.1.2 R31.1.2 Reg1.1.2 U5.1.3 U7.1.1 | length 136.4
  Top Layer w0.43: 1.1.5@496.819,300.331 498.069,300.331 498.691,299.709 499.819,299.709 C47.1.2@500.471,299.709 C47.1.2@500.621,299.709
  Top Layer w0.51: D11.1.2@477.77,290.843 478.203,290.843 478.14,290.906 v1(478.14,291.91) 479.207,290.843 D9.1.2@480.404,290.843 ; U5.1.3@481.56,307.03 481.56,308.76 v1(482.18,309.38) 482.18,309.54 483.227,310.587 C24.1.1@483.549,310.587 ; R31.1.2@486.007,292.811 487.011,292.811 v1(487.81,293.61) ; v1(490.64,305.96) 490.64,303.92 490.62,303.9 491.605,302.915 D16.1.2@491.605,302.22 ; DI1.1.8@495.724,314.506 497.827,314.506 C26.1.2@497.903,314.582 497.903,313.757 499.56,312.101 ; R18.1.2@497.207,312.101 499.56,312.101 ; v1(498.089,298.319) 498.429,298.319 C47.1.2@499.819,299.709 ; v1(500.299,288.979) 502.401,288.979 503.81,287.57 503.81,264.75 502.76,263.7 U7.1.1@502.76,262.625 ; C47.1.2@500.421,299.849 v1@502.256,301.684 ; Q3.1.2@501.6,310.56 501.101,310.56 499.56,312.101 ; Q3.1.2@501.86,310.56 502.17,310.56 503.2,309.53 503.2,308.22 504.28,307.14 504.28,305.637 505.167,304.75 505.525,304.75 C32.1.1@505.525,303.818 ; v1(502.3,301.64) 504.195,301.64 505.337,300.497 505.337,303.477 C32.1.1@505.525,303.477
  Bottom Layer w0.51: v1(478.14,291.91) 478.14,293 478.78,293.64 487.78,293.64 v1(487.81,293.61) 487.81,293.43 487.99,293.61 498.96,293.61 ; v1(482.18,309.38) 487.27,309.38 490.42,306.23 494.08,306.23 497.65,302.66 501.28,302.66 v1(502.3,301.64) ; v1(498.089,298.319) 498.089,294.481 498.96,293.61 ; 498.96,293.61 498.96,292.74 498.98,292.72 498.958,292.698 500.299,291.358 v1(500.299,288.979) ; v1(500.299,288.979) 500.749,288.979 500.524,288.754 v1(500.299,288.979)
+5V_ISO.2: 1.2.5 C24.2.1 C26.2.2 C32.2.1 C47.2.2 D9.2.2 D11.2.2 D16.2.2 DI1.2.8 Q3.2.2 R18.2.2 R31.2.2 Reg1.2.2 U5.2.3 U7.2.1 | length 136.3
  Top Layer w0.43: 1.2.5@550.369,300.751 551.619,300.751 552.241,300.129 553.369,300.129 C47.2.2@554.021,300.129 C47.2.2@554.171,300.129
  Top Layer w0.51: D11.2.2@531.32,291.263 531.753,291.263 531.69,291.326 v1(531.69,292.33) 532.757,291.263 D9.2.2@533.954,291.263 ; U5.2.3@535.11,307.45 535.11,309.18 v1(535.73,309.8) 535.73,309.96 536.777,311.007 C24.2.1@537.099,311.007 ; R31.2.2@539.557,293.231 540.561,293.231 v1(541.36,294.03) ; v1(544.19,306.38) 544.19,304.34 544.17,304.32 545.155,303.335 D16.2.2@545.155,302.64 ; DI1.2.8@549.274,314.926 551.377,314.926 C26.2.2@551.453,315.003 551.453,314.178 553.11,312.521 ; R18.2.2@550.757,312.521 553.11,312.521 ; v1(551.639,298.74) 551.979,298.74 C47.2.2@553.369,300.129 ; v1(553.849,289.4) 555.951,289.4 557.36,287.99 557.36,265.15 556.31,264.1 U7.2.1@556.31,263.045 ; C47.2.2@553.971,300.269 v1@555.806,302.104 ; Q3.2.2@555.15,310.98 554.651,310.98 553.11,312.521 ; Q3.2.2@555.41,310.98 555.72,310.98 556.75,309.95 556.75,308.64 557.83,307.56 557.83,305.923 C32.2.1@559.142,304.611 559.142,301.485 Reg1.2.2@558.82,301.162 ; v1(555.85,302.06) 557.745,302.06 Reg1.2.2@558.887,300.918
  Bottom Layer w0.51: v1(531.69,292.33) 531.69,293.42 532.33,294.06 541.33,294.06 v1(541.36,294.03) 541.36,293.85 541.54,294.03 552.51,294.03 ; v1(535.73,309.8) 540.82,309.8 543.97,306.65 547.63,306.65 551.2,303.08 554.83,303.08 v1(555.85,302.06) ; v1(551.639,298.74) 551.639,294.901 552.51,294.03 ; 552.51,294.03 552.51,293.16 552.53,293.14 552.508,293.119 553.849,291.778 v1(553.849,289.4) ; v1(553.849,289.4) 554.299,289.4 554.074,289.174 v1(553.849,289.4)
+12V: Cin1.1.1 Cin1.2.1 Cin2.1.1 Cin2.2.1 P4.2 Transformer1.1.2 Transformer1.2.2 U9.1.12 U9.2.12 | length 219.2
  Top Layer w0.51: Cin1.1.1@520.59,313.277 519.538,312.225 U9.1.12@517.728,312.225 516.686,312.225 514.86,310.399 514.86,306.481 Transformer1.1.2@515.341,306 518.269,303.072 Cin2.1.1@520.427,303.072 520.293,302.937 520.293,301.82 520.647,301.466 523.918,301.466 524.49,302.038 524.49,323.652 v1@524.798,323.96 ; v1(524.63,330) 571.25,330 578.15,323.1 578.15,302.568 577.468,301.886 574.197,301.886 573.843,302.241 573.843,303.357 573.977,303.492 571.819,303.492 568.41,306.901 568.41,310.82 570.236,312.645 573.088,312.645 Cin1.2.1@574.14,313.697
  Top Layer w1: P4.2@462.72,325.74 462.72,327.05 468.28,332.61 499.73,332.61 502.34,330 v1(524.63,330)
  Bottom Layer w0.51: v1(524.57,323.96) 524.57,329.94 v1(524.63,330)
+12V_ISO.1: C19.1.2 C20.1.1 C21.1.1 C27.1.1 C29.1.1 C30.1.1 D18.1.2 D19.1.2 R36.1.2 Reg1.1.3 U8.1.1 U8.1.8 | length 85
  Top Layer w0.51: R36.1.2@486.717,317.941 487.489,317.941 489.45,315.98 501.31,315.98 501.454,315.836 501.473,315.836 502.46,314.849 v1(502.46,312.11) ; U8.1.8@498.46,290.9 U8.1.8@498.46,291.74 ; C21.1.1@500.621,294.282 500.312,294.591 499.451,294.591 498.46,293.6 ; C19.1.2@500.623,296.995 500.479,297.139 C19.1.2@500.473,297.139 499.249,297.139 U8.1.1@498.46,296.35 498.46,293.6 ; Reg1.1.3@509.921,300.65 510.01,300.739 v1(510.01,303.3) ; Reg1.1.3@510.101,300.3 510.101,298.34 511.331,297.11 511.331,293.281 D19.1.2@512.811,291.801 ; C30.1.1@512.097,288.64 511.827,288.37 505.898,288.37 503.51,290.758 501.652,290.758 500.617,291.793 500.617,292.041 C20.1.1@500.467,292.041 498.761,292.041 U8.1.8@498.46,291.74 ; C30.1.1@512.147,289.397 512.147,291.138 D19.1.2@512.811,291.801 ; C27.1.1@514.914,291.759 C27.1.1@514.956,291.801 ; C29.1.1@520.727,296.151 519.82,295.244 519.82,293.73 D18.1.2@517.891,291.801 515.726,291.801 C27.1.1@515.341,292.186 C27.1.1@514.956,291.801 ; U8.1.8@498.46,291.74 498.46,293.6 ; D19.1.2@512.811,291.801 C27.1.1@514.956,291.801
  Bottom Layer w0.51: v1@502.47,312.11 502.47,308.93 503.69,307.71 505.573,307.71 509.983,303.3 v1(510.01,303.3)
+12V_ISO.2: C19.2.2 C20.2.1 C21.2.1 C27.2.1 C29.2.1 C30.2.1 D18.2.2 D19.2.2 R36.2.2 Reg1.2.3 U8.2.1 U8.2.8 | length 85.1
  Top Layer w0.51: R36.2.2@540.267,318.361 541.039,318.361 543,316.4 554.86,316.4 555.004,316.256 555.023,316.256 556.01,315.269 v1(556.01,312.53) ; U8.2.8@552.01,291.32 U8.2.8@552.01,292.16 ; C21.2.1@554.171,294.702 553.862,295.011 553.001,295.011 552.01,294.02 ; C19.2.2@554.173,297.416 554.029,297.56 C19.2.2@554.023,297.56 552.799,297.56 U8.2.1@552.01,296.77 552.01,294.02 ; Reg1.2.3@563.42,301.162 563.42,299.566 565.125,297.86 565.125,293.741 D19.2.2@566.426,292.441 ; Reg1.2.3@563.471,301.07 563.56,301.16 v1(563.56,303.72) ; C30.2.1@565.529,288.79 559.448,288.79 557.06,291.178 555.202,291.178 554.167,292.213 554.167,292.461 C20.2.1@554.017,292.461 552.311,292.461 U8.2.8@552.01,292.16 ; C30.2.1@566.507,289.768 566.507,292.359 D19.2.2@566.426,292.441 ; C29.2.1@574.342,296.791 573.365,295.814 573.365,293.85 571.956,292.441 D18.2.2@571.506,292.441 D19.2.2@566.426,292.441 ; U8.2.8@552.01,292.16 552.01,294.02
  Bottom Layer w0.51: v1@556.02,312.53 556.02,309.35 557.24,308.13 559.123,308.13 563.533,303.72 v1(563.56,303.72)
CMD1: P5.1 R41.1.2 R83.1 | length 41.2
  Top Layer w0.51: R83.1@461.649,310.077 465.277,310.077 P5.1@465.36,310.16 467.36,310.16 470.39,313.19 470.39,320.11 475.227,324.947 R41.1.2@492.679,324.947
CMD2: P5.4 R41.2.2 R82.1 | length 92.1
  Top Layer w0.51: R82.1@461.561,318.123 R82.1@461.649,318.123 465.017,318.123 P5.4@465.36,317.78 467.19,317.78 467.78,318.37 467.78,321.6 474.18,328 495.59,328 498.219,325.371 R41.2.2@546.264,325.371
COMMAND.1: 1.1.1 D13.1.2 DI1.1.6 | length 16
  Top Layer w0.43: D13.1.2@491.95,307.91 491.95,304.18 493.025,303.105 493.025,301.685 494.289,300.421 1.1.1@494.749,300.421
  Top Layer w0.51: D13.1.2@491.91,307.97 491.91,312.1 493.184,313.374 DI1.1.6@493.184,314.506
COMMAND.2: 1.2.1 D13.2.2 DI1.2.6 | length 16
  Top Layer w0.43: D13.2.2@545.5,308.33 545.5,304.6 546.575,303.525 546.575,302.105 547.839,300.841 1.2.1@548.299,300.841
  Top Layer w0.51: D13.2.2@545.46,308.39 545.46,312.52 546.734,313.794 DI1.2.6@546.734,314.926
CT.1: C34.1.1 R46.1.2 U9.1.5 | length 6.7
  Top Layer w0.51: R46.1.2@509.245,316.214 C34.1.1@509.245,313.928 509.832,313.928 509.832,313.889 511.496,312.225 U9.1.5@512.928,312.225
CT.2: C34.2.1 R46.2.2 U9.2.5 | length 6.6
  Top Layer w0.51: R46.2.2@562.86,316.854 C34.2.1@562.86,314.568 563.582,314.568 565.48,312.67 U9.2.5@566.348,312.67
D1: C11.1.1 C43.1 C44.1 Ca1.1 Ca2.1 pad.2@492.758,257.171 pad.2@514.927,257.171 Pin_+1.1 Pin_+2.1 Q8.2 Q9.2 R22.1.2 R23.1.2 R74.1 | length 111.8
  Top Layer w0.51: R23.1.2@475.271,260.357 C11.1.1@477.69,260.357 R22.1.2@480.54,260.357 480.54,259.42 482.27,257.69 489.13,257.69 492.752,261.312 Q9.2@492.752,261.989
  Top Layer w2: C43.1@593.97,310.17 593.97,317.44 603.5,326.97 R74.1@612.99,326.97
  Top Layer w5: Pin_+2.1@589.75,251.71 593.97,255.93 C44.1@593.97,272.45 C43.1@593.97,310.17
  other v1: 514.24,233.89 515.52,233.89 516.8,233.89 518.08,233.89 519.36,233.89 520.64,233.89 521.92,233.89 523.2,233.89 524.48,233.89 514.24,235.17 515.52,235.17 516.8,235.17 518.08,235.17 519.36,235.17 520.64,235.17 521.92,235.17 523.2,235.17 524.48,235.17 514.24,236.45 515.52,236.45 516.8,236.45 518.08,236.45 519.36,236.45 520.64,236.45 521.92,236.45 523.2,236.45 524.48,236.45 514.24,237.73 518.08,237.73 519.36,237.73 520.64,237.73 521.92,237.73 523.2,237.73 524.48,237.73
D2: C11.2.1 Pin_A1.1 Q8.3 Q9.3 Q10.2 Q11.2 R22.2.2 R23.2.2 R39.1.1 | length 53.6
  Top Layer w0.51: Q8.3@520.38,261.99 520.381,261.989 523.479,261.989 524.63,263.14 524.63,287.84 523.098,289.372 R39.1.1@522.67,289.372 ; R23.2.2@528.821,260.777 C11.2.1@531.24,260.777 R22.2.2@534.09,260.777 534.09,259.83 536.28,257.64 542.14,257.64 Q10.2@546.31,261.81 ; Q10.2@546.31,261.58 Q10.2@546.31,261.81 ; Q10.2@546.31,262.07 Q10.2@546.31,261.81
DT_CON.1: C31.1.2 Q5.1.3 R42.1.2 U9.1.4 | length 12.4
  Top Layer w0.51: R42.1.2@509.245,318.457 C31.1.2@509.245,320.734 ; R42.1.2@509.499,318.457 511.16,318.457 ; Q5.1.3@512.801,319.591 512.294,319.591 511.16,318.457 ; U9.1.4@512.928,313.495 511.785,313.495 511.16,314.12 511.16,318.457
DT_CON.2: C31.2.2 Q5.2.3 R42.2.2 U9.2.4 | length 12.2
  Top Layer w0.51: R42.2.2@562.86,319.097 C31.2.2@562.86,321.374 ; R42.2.2@563.605,319.097 563.605,319.26 564.58,319.26 ; Q5.2.3@566.416,320.231 565.551,320.231 564.58,319.26 ; U9.2.4@566.54,313.955 565.735,313.955 564.58,315.11 564.58,319.26
FEEDBACK.1: U9.1.3
FEEDBACK.2: U9.2.3